# Altium PCB Harvester_PB1_BOOST.PcbDoc
Units mm, origin at the board's own origin, x right, y up, seen from the top; angles counter-clockwise.
Board outline 107.19 x 73.28 mm, 2 copper layers (Top Layer, Bottom Layer); 50 components, 20 nets, 123 pads, 0 vias.
Unrouted connection lines stored in the file: 97.
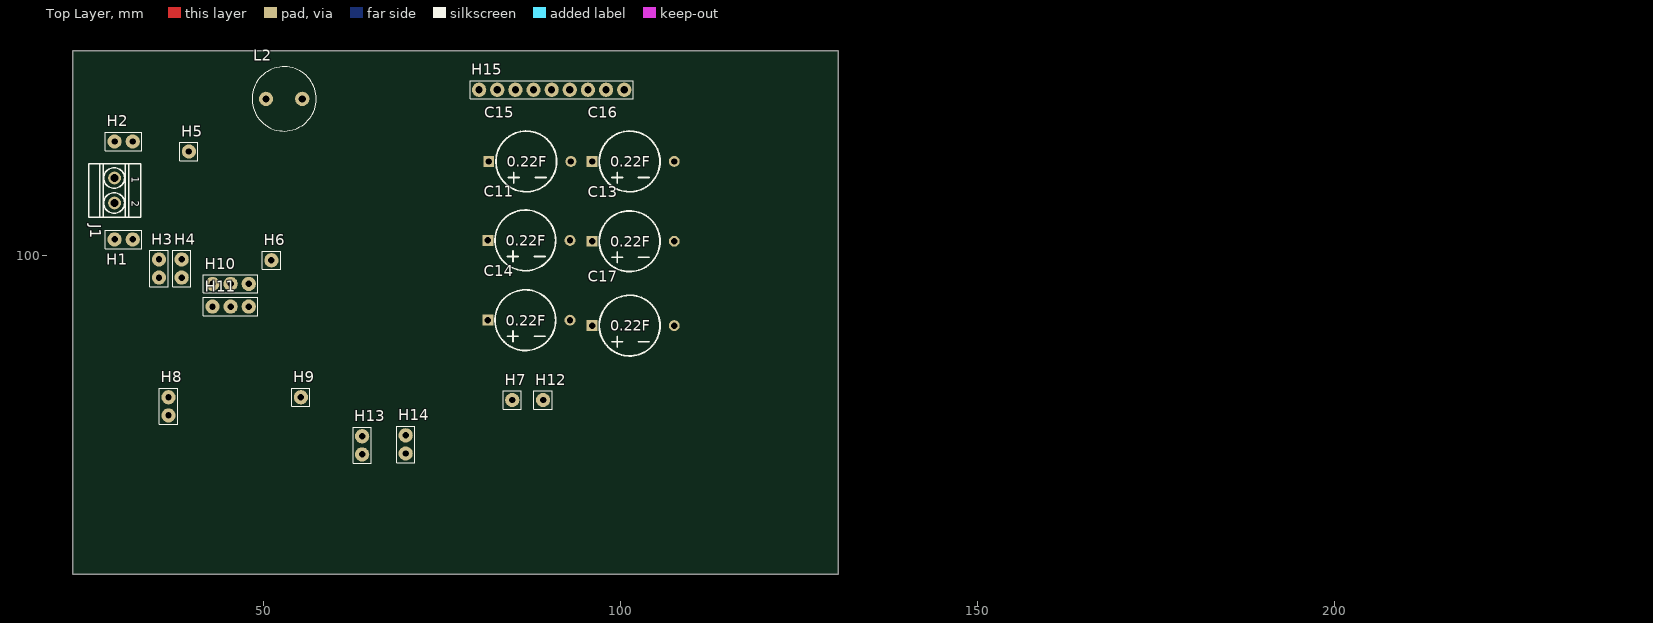
[diagram p0: Top Layer view]
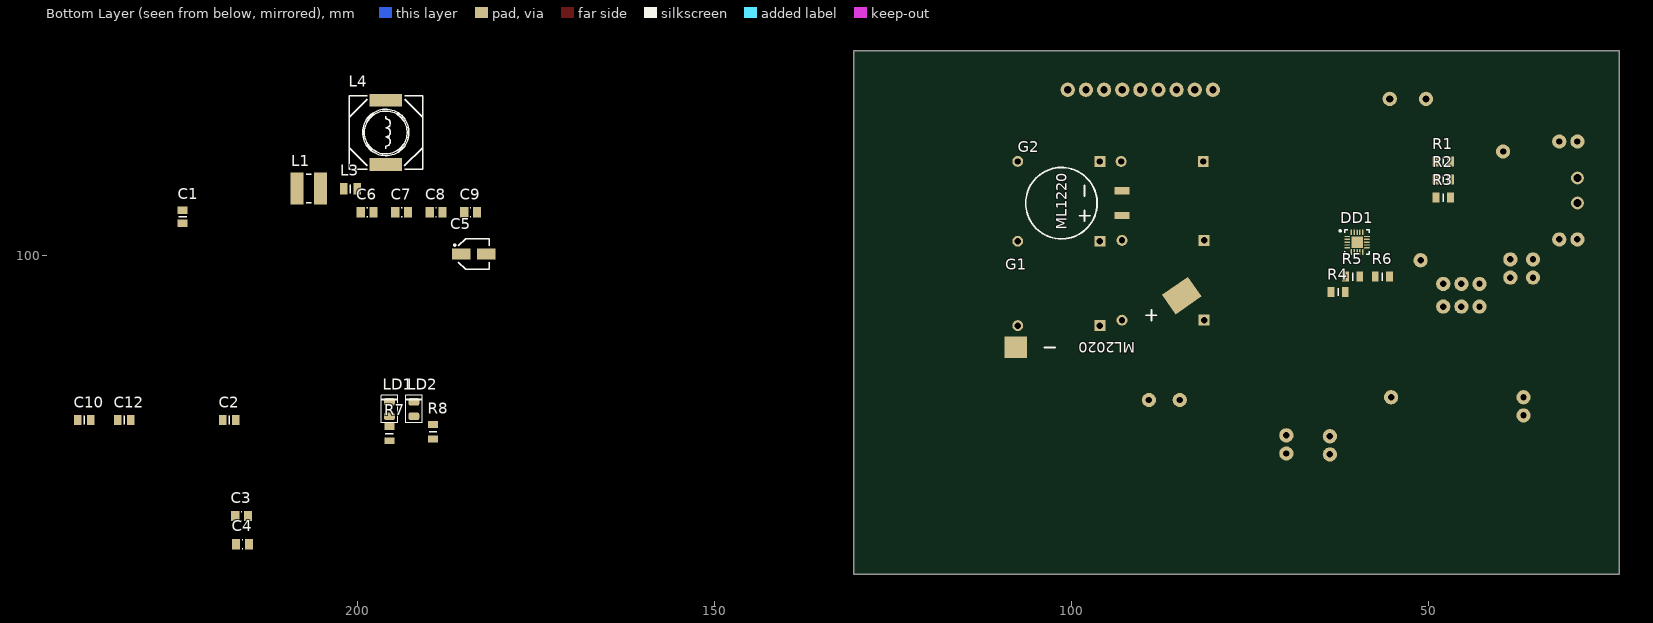
[diagram p1: Bottom Layer view, seen from below]

## Layer stack, top to bottom
Top Solder: solder mask 0.0102, Solder Resist, Dk 3.5
Top Layer: signal copper 0.0356
Dielectric 1: dielectric 0.32, FR-4, Dk 4.8
Bottom Layer: signal copper 0.0356
Bottom Solder: solder mask 0.0102, Solder Resist, Dk 3.5

## Board outline
23.368,55.372 23.368,128.651 130.556,128.651 130.556,55.372

## Design rules (kind name [scope] priority, off if disabled: settings)
Clearance [All] p1: gap=0.15
PolygonConnect [All] p1: connectstyle=Relief reliefconductorwidth=0.254 reliefentries=4 polygonreliefangle="90 Angle" airgapwidth=0.254
RoomDefinition Harvester_PB1_BOOST [InComponentClass('Harvester_PB1_BOOST')] p1: confinementstyle=ConfineIn formatcopy=TRUE lockcomponents=FALSE outline 16.919,25.146 181.102,25.146 181.102,126.619 16.919,126.619
RoutingVias [All] p1: holewidth=0.711 width=1.27 viastyle="Through Hole" minholewidth=0.711 minwidth=1.27 maxholewidth=0.711 maxwidth=1.27
SolderMaskExpansion [All] p1: expansion=0.102
Width [All] p1: maxlimit=0.254 minlimit=0.254 preferedwidth=0.254
30 further rules are at their usual default settings.

## Components (designator, comment, footprint, x,y, rotation, side; value= is the part's Value field where it differs from the comment)
C1 "1nF" CAPC2012X135N 224.536,105.41 r270 bottom
C2 "1nF" CAPC2012X135N 217.995,76.962 r180 bottom
C3 "CAP" CAPC0805(2012)100_N 216.281,63.5 r180 bottom
C4 "CAP" CAPC0805(2012)100_N 216.154,59.563 r180 bottom
C5 "47uF" CAPAE430X540N 183.769,100.203 r180 bottom
C6 "CAP" CAPC0805(2012)100_N 198.691,106.045 r180 bottom
C7 "CAP" CAPC0805(2012)100_N 193.865,106.045 r180 bottom
C8 "CAP" CAPC0805(2012)100_N 189.04,106.045 r180 bottom
C9 "CAP" CAPC0805(2012)100_N 184.213,106.045 r180 bottom
C10 "1nF" CAPC2012X135N 238.315,76.962 r180 bottom
C11 "CAP_pol" EEC-S0HD224HN 86.741,102.108 r0 top
C12 "1nF" CAPC2012X135N 232.727,76.962 r180 bottom
C13 "CAP_pol" EEC-S0HD224HN 101.346,101.981 r0 top
C14 "CAP_pol" EEC-S0HD224HN 86.741,90.932 r0 top
C15 "CAP_pol" EEC-S0HD224HN 86.868,113.157 r0 top
C16 "CAP_pol" EEC-S0HD224HN 101.346,113.157 r0 top
C17 "CAP_pol" EEC-S0HD224HN 101.346,90.17 r0 top
DD1 "SPV1050" QFN40P300X300X100_HS-21L 60.071,101.854 r180 bottom
G1 "Battery Lion" ML2020 94.869,87.122 r0 bottom
G2 "Battery Lion" ML1220 101.473,107.315 r90 bottom
H1 "H-1x2" J1x2 30.48,102.235 r180 top
H2 "H-1x2" J1x2 30.48,115.951 r180 top
H3 "H-1x2" J1x2 35.433,98.171 r270 top
H4 "H-1x2" J1x2 38.608,98.171 r270 top
H5 "H-1" J1 39.624,114.554 r0 top
H6 "H-1" J1 51.181,99.314 r0 top
H7 "H-1" J1 84.9,79.756 r0 top
H8 "H-1x2" J1x2 36.767,78.867 r90 top
H9 "H-1" J1 55.308,80.137 r0 top
H10 "H-1x3" J1x3 45.466,96.012 r0 top
H11 "H-1x3" J1x3 45.466,92.837 r0 top
H12 "H-1" J1 89.218,79.756 r0 top
H13 "H-1x2" J1x2 63.881,73.406 r270 top
H14 "H-1x2" J1x2 69.977,73.533 r270 top
H15 "H-1x9" J1x9 90.424,123.19 r180 top
J1 "Family" PHOENIX_1751248 29.21,109.093 r270 top
L1 "BOUR-IND-2A" BOUR-SDR0403-2_V 206.883,109.347 r0 bottom
L2 "33u" Dr-CW8A 52.959,121.92 r180 top
L3 "22nH" INDC2014X145N 201.041,109.347 r0 bottom
L4 "10uH" IND_WURTH_WE-TPC_XL 196.088,117.221 r270 bottom
LD1 "Led" "Led 0805-Green" 195.58,78.486 r90 bottom
LD2 "Led" "Led 0805-Green" 192.151,78.486 r90 bottom
R1 "5k6" RESC2012X60N 48.006,113.157 r0 bottom
R2 "5k6" RESC2012X60N 48.006,110.617 r0 bottom
R3 "5k6" RESC2012X60N 48.006,108.077 r180 bottom
R4 "5k6" RESC2012X60N 62.738,94.869 r0 bottom
R5 "5k6" RESC2012X60N 60.706,97.028 r0 bottom
R6 "5k6" RESC2012X60N 56.515,97.028 r0 bottom
R7 "5k6" RESC2012X60N 195.58,75.057 r270 bottom
R8 "5k6" RESC2012X60N 189.484,75.311 r270 bottom

## Footprints (in the part's own frame and the unit in brackets; to place one, negate y for a bottom-side part, rotate by r counter-clockwise, add the part's x,y. Pads: shape width x height; smd on the part's side, far side on the other; paste and mask are expansions set on the pad)
BOUR-SDR0403-2_V [mm] "SMD, 2-Leads, Dia 4.5mm, Height 3.5mm"
  rect 1.8x4.5 smd: 1(-1.65,0) 2(1.65,0)
  silkscreen extent -0.35,-2 0.35,2, body extent -2.25,-2 2.25,2, height 3.5
CAPAE430X540N [mm] "Capacitor, Aluminium Electrolytric, 4.3mm L X 4.3mm W X 5.4mm H, IPC Medium Density"
  rect 2.55x1.6 smd: 1(-1.75,0) 2(1.75,0)
  silkscreen extent -2.8,-2.15 2.15,2.15, body extent -2.75,-2.25 2.75,2.25, height 5.7
CAPC0805(2012)100_N [mm] "Chip Capacitor, Body 2.0x1.2mm, Height 1.0mm, IPC Medium Density"
  rect 1.15x1.45 smd: 1(-0.9,0) 2(0.9,0)
  silkscreen extent -0.05,-0.62 0.05,0.63, body extent -1.1,-0.72 1.1,0.73, height 1
CAPC2012X135N [mm] "Chip Capacitor, Body 2.0x1.25mm, IPC Medium Density"
  rect 1.05x1.4 smd: 1(-0.9,0) 2(0.9,0)
  silkscreen extent 0,-0.58 0,0.58, body extent -1.05,-0.67 1.05,0.68, height 1.25
Dr-CW8A [mm]
  round 2 hole 1: 1(-2.54,0) 2(2.54,0)
  silkscreen extent -4.5,-4.5 4.5,4.5, body extent -4.5,-4.5 4.5,4.5, height 13.27
EEC-S0HD224HN [mm] "Supercap"
  rect 1.524x1.524 hole 0.9: +(-5.25,0)
  round 1.524 hole 0.9: -(6.25,0)
  silkscreen extent -4.25,-4.25 4.25,4.25, body extent -5,-5 5,5, height 6.5
IND_WURTH_WE-TPC_XL [mm] "Shielded Tiny Power Inductor, Body 10.3x10.3mm"
  rect 1.8x4.6 smd: 1(-4.5,0) 2(4.5,0)
  silkscreen extent -5.15,-5.15 5.15,5.15, body extent -5.15,-5.15 5.15,5.15, height 3.1
INDC2014X145N [mm] "Chip Inductor, EIA 0805, Metric 2014, Body 2.05x1.4mm, IPC Medium Density"
  rect 1.05x1.6 smd: 1(-0.95,0) 2(0.95,0)
  silkscreen extent 0,-0.55 0,0.63, body extent -1,-0.66 1.2,0.74, height 1.45
J1 [mm]
  round 2 hole 0.9: 1(0,0)
  silkscreen extent -1.27,-1.27 1.27,1.27, body extent -1.27,-1.27 1.27,1.27, height 10.1
J1x2 [mm]
  round 2 hole 0.9: 1(-1.27,0) 2(1.27,0)
  silkscreen extent -2.54,-1.27 2.54,1.27, body extent -2.54,-1.27 2.54,1.27, height 10.1
J1x3 [mm]
  round 2 hole 0.9: 1(-2.54,0) 2(0,0) 3(2.54,0)
  silkscreen extent -3.81,-1.27 3.81,1.27, body extent -3.81,-1.27 3.81,1.27, height 10.1
J1x9 [mm]
  round 2 hole 1: 1(-10.16,0) 2(-7.62,0) 3(-5.08,0) 4(-2.54,0) 5(0,0) 6(2.54,0) 7(5.08,0) 8(7.62,0) 9(10.16,0)
  silkscreen extent -11.43,-1.27 11.43,1.27, body extent -11.43,-1.27 11.43,1.27, height 10.1
"Led 0805-Green" [mil]
  rrect50% 40x60 smd: 1(-40,0) 2(40,0)
  silkscreen extent -75,-45 75,45, body extent -40,-25 40,25, height 43
ML1220 [mm] "Litium battery 3V rechargable"
  rect 1x2.1 smd: +(-1.75,-8.5) -(1.75,-8.5)
  silkscreen extent -5,-5 5,5, body extent -6.3,-6.3 6.3,6.3, height 2.6
ML2020 [mm] "Litium battery 3V rechargable"
  rect 4.4x3.4 smd rot 35: +(-10.25,-7.25)
  rect 3.2x3 smd: -(13,0)
  silkscreen extent -6.75,-5.25 9,0, body extent -10,-10 10,10, height 2.6
PHOENIX_1751248 [mm] "Terminal Block, 10A 160V, Pitch 3.5mm, 2 Positions, Screw Connection"
  round 1.8 hole 1.1: 1(-1.75,0) 2(1.75,0)
  silkscreen extent -3.75,-3.6 3.75,3.7, body extent -3.75,-3.6 3.75,3.7, height 8.5
QFN40P300X300X100_HS-21L [mm] "QFN, 20-Leads, Body 3.00x3.00mm, Pitch 0.40mm, Thermal Pad 1.60x1.60mm, IPC High Density"
  oval 0.8x0.2 smd: 1(-1.375,0.8) 2(-1.375,0.4) 3(-1.375,0) 4(-1.375,-0.4) 5(-1.375,-0.8) 11(1.375,-0.8) 12(1.375,-0.4) 13(1.375,0) 14(1.375,0.4) 15(1.375,0.8)
  oval 0.2x0.8 smd: 6(-0.8,-1.375) 7(-0.4,-1.375) 8(0,-1.375) 9(0.4,-1.375) 10(0.8,-1.375) 16(0.8,1.375) 17(0.4,1.375) 18(0,1.375) 19(-0.4,1.375) 20(-0.8,1.375)
  rect 1.6x1.6 smd: 21(0,0)
  silkscreen extent -2.5,-1.72 1.72,1.73, body extent -1.63,-1.63 1.63,1.63, height 1
RESC2012X60N [mm] "Chip Resistor, EIA 0805, Metric 2012, Body 2.0x1.2mm, IPC Medium Density"
  rect 0.95x1.4 smd: 1(-1,0) 2(1,0)
  silkscreen extent 0,-0.55 0,0.55, body extent -1.1,-0.67 1.1,0.68, height 0.6

## Part data
C1 C2 C10 C12: library part CC0805_1NF_50V_5%_X7R, "Non-polarised capacitor"
C5: library part CAE430-540_47UF_6.3V_20%, "Polarised capacitor"
C11 C13 C14 C15 C16 C17: library part CAP_Pol
DD1: library part svp1050_vfqfpn, "Ultralow power energy harvester and battery charger"
J1: library part PHOENIX_1751248, "Terminal Block, 2 Positions, Screw Connection"
L2: library part "Dr CW8A 33uH", "2A 0.07om"
L3: library part IND0805_22NH_5%_EPCOS_B82498B, "Inductor With Magnetic core"
L4: library part IND_10UH_30%_WURTH_WE-TPC_744065100, "Inductor With Magnetic core"
LD1 LD2: library part "Led 0805 KP-2012SGC", "Green 565nm 15mcd"
R1 R2 R3 R4 R5 R6 R7 R8: library part R0805_5K6_1%_0.125W_100PPM, "Resistor - 1%"

## Nets (pads, with @x,y where several pads share a name; then routed paths per layer and width w, separated by ;. In a path a pad name is that pad's centre, name@x,y a point inside that pad or via, vN(x,y) a via of type N, cw(c..) or ccw(c..) an arc to the next point about the centre after c; other vN are vias at no path point)
"+1.8V LDO": C10.2 DD1.11 H15.3
"+3.3V LDO": C12.2 DD1.12 H15.5
B\A\T\_\C\H\G\: DD1.7 H15.8 LD1.2
B\A\T\_\C\O\N\N\: DD1.8 H15.9 LD2.2
BATT: C11.+ C13.+ C14.+ C15.+ C16.+ C17.+ DD1.14 G1.+ G2.+ H15.2
GND: C1.1 C2.1 C3.1 C4.1 C5.2 C6.1 C7.1 C8.1 C9.1 C10.1 C11.- C12.1 C13.- C14.- C15.- C16.- C17.- DD1.4 DD1.18 DD1.19 DD1.20 G1.- G2.- H2.1 H2.2 H8.1 H10.1 H11.1 H15.4 H15.6 J1.1
NetC2_2: C2.2 DD1.3 H8.2 H9.1
NetDD1_1: DD1.1 H3.1 H5.1 R1.1
NetDD1_2: DD1.2 H4.1 H6.1 R2.1 R3.2
NetDD1_5: DD1.5 H10.2
NetDD1_6: DD1.6 H11.2
NetDD1_9: DD1.9 R5.1 R6.2
NetDD1_10: DD1.10 R4.1 R5.2
NetDD1_16: DD1.16 H12.1 L1.2 L2.2 L3.2 L4.2
NetH13_1: H13.1 R7.2
NetH14_1: H14.1 R8.2
NetLD1_1: LD1.1 R7.1
NetLD2_1: LD2.1 R8.1
STORE: C5.1 C6.2 C7.2 C8.2 C9.2 DD1.15 H3.2 H4.2 H10.3 H11.3 H13.2 H14.2 H15.1 R4.2
VIN: C1.2 C3.2 C4.2 DD1.13 H1.1 H1.2 H7.1 J1.2 L1.1 L2.1 L3.1 L4.1 R1.2
pads on no net: DD1.17 DD1.21 H15.7 R2.2 R3.1 R6.1

## Silkscreen, mask and mechanical layers (free items; w line width, h text height)
Mechanical 1:
  the board outline again, w0.254

## Text inside footprints (layer, text, board x,y; h text height)
C11: Top Overlay "0.22F" at 83.991,101.358 h1.5
C13: Top Overlay "0.22F" at 98.596,101.231 h1.5
C14: Top Overlay "0.22F" at 83.991,90.182 h1.5
C15: Top Overlay "0.22F" at 84.118,112.407 h1.5
C16: Top Overlay "0.22F" at 98.596,112.407 h1.5
C17: Top Overlay "0.22F" at 98.596,89.42 h1.5
G1: Bottom Overlay "ML2020" at 91.119,87.872 h1.5 r180
G2: Bottom Overlay "ML1220" at 100.723,103.565 h1.5 r270
J1: Top Overlay "1" at 31.585,111.043 h1 r270; Top Overlay "2" at 31.585,107.643 h1 r270